# Altium PCB Power_Path_Controller.PcbDoc
Units mm, origin at the board's own origin, x right, y up, seen from the top; angles counter-clockwise.
Board outline 152.4 x 101.6 mm, 2 copper layers (Top Layer, Bottom Layer); 14 components, 6 nets, 32 pads, 0 vias.
Unrouted connection lines stored in the file: 15.
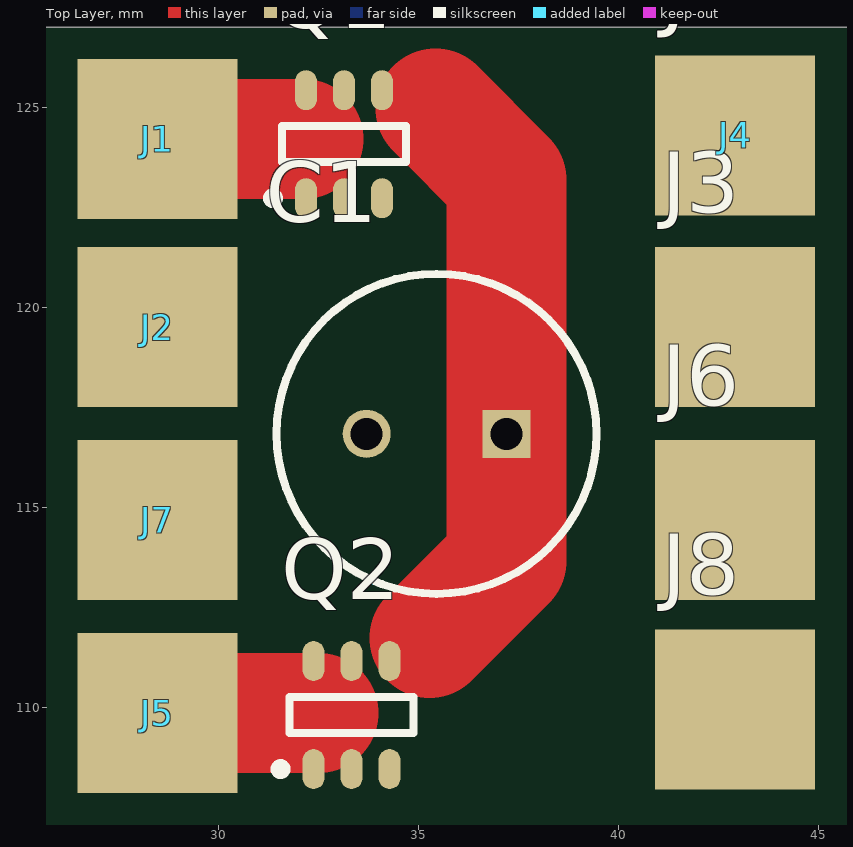
[diagram p0: Top Layer view]
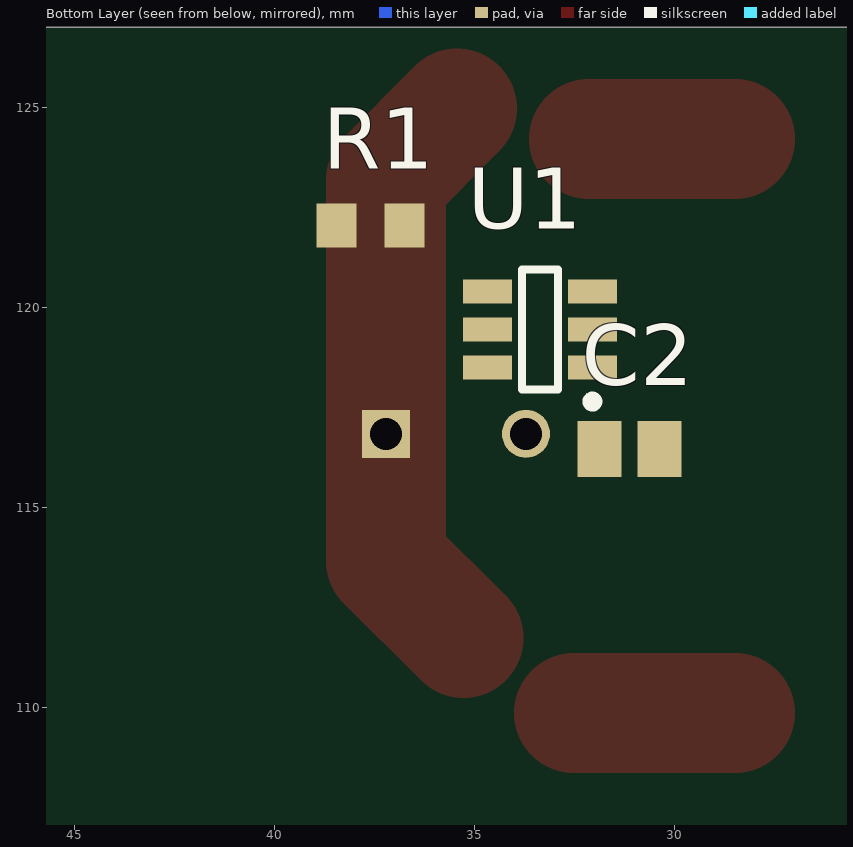
[diagram p1: Bottom Layer view, seen from below]

## Layer stack, top to bottom
Top Solder: solder mask 0.0102, Solder Resist, Dk 3.5
Top Layer: signal copper 0.0356
Dielectric 1: dielectric 0.32, FR-4, Dk 4.8
Bottom Layer: signal copper 0.0356
Bottom Solder: solder mask 0.0102, Solder Resist, Dk 3.5

## Board outline
25.4,25.4 177.8,25.4 177.8,127 25.4,127

## Design rules (kind name [scope] priority, off if disabled: settings)
Clearance [All] p1: gap=0.2 ignorepadtopadclearanceinfootprint=FALSE except(0: Arc-Hole Track-Hole SMDPad-Hole THPad-Hole Via-Hole Fill-Hole Poly-Hole Region-Hole Text-Hole)
HoleSize [All] p1: absolutevalues=TRUE maxlimit=3 minlimit=0.2 maxpercent=80.000 minpercent=20.000
HoleToHoleClearance [All] p1: gap=0.15 allowstackedmicrovias=TRUE
MinimumAnnularRing [All] p1: minimumring=0.2
PlaneClearance [All] p1: clearance=0.5
PlaneConnect [All] p1: planeconnectstyle=Relief reliefexpansion=0.3 reliefentries=4 reliefconductorwidth=0.4 reliefairgap=0.2
PolygonConnect PolygonConnect_VIA [IsVia vs InPolygon] p1: connectstyle=Direct reliefconductorwidth=0.254 reliefentries=4 polygonreliefangle="90 Angle" airgapwidth=0.254
PolygonConnect [All] p2: connectstyle=Relief reliefconductorwidth=0.3 reliefentries=4 polygonreliefangle="90 Angle" airgapwidth=0.2
RoutingCorners [All] p1: cornerstyle=45-Degree minsetback=0.2 maxsetback=2.5
RoutingVias [All] p1: holewidth=0.3 width=0.7 viastyle="Through Hole" minholewidth=0.2 minwidth=0.6 maxholewidth=3 maxwidth=4
SilkToSilkClearance [All] p1: silktosilkclearance=0.2
SilkToSolderMaskClearance [IsPad] p1: minsilkscreentomaskgap=0.2 clearancetoexposedcopper=TRUE
SolderMaskExpansion SolderMaskExpansion_VIA [IsVia] p1: expansion=-1
SolderMaskExpansion [All] p2: expansion=0.1
Width [All] p1: maxlimit=5 minlimit=0.2 preferedwidth=0.3
23 further rules are at their usual default settings.

## Components (designator, comment, footprint, x,y, rotation, side; value= is the part's Value field where it differs from the comment)
C1 "470uF" CAPPRD350W60D800H1700 37.211,116.84 r180 top
C2 "10uF*V" C0805 31.127,116.459 r0 bottom
J1 "POW_AD_18V" Wire_Pad 28.575,124.206 r90 top
J2 "POW_AD_GND" Wire_Pad 28.575,119.507 r90 top
J3 "PC_HOT" Wire_Pad 42.926,119.413 r0 top
J4 "ELEC_HOT" Wire_Pad 42.926,124.206 r0 top
J5 "BAT_16V8" Wire_Pad 28.481,109.761 r0 top
J6 "PC_GND" Wire_Pad 42.926,114.587 r0 top
J7 "BAT_GND" Wire_Pad 28.481,114.587 r0 top
J8 "ELEC_GND" Wire_Pad 42.926,109.855 r0 top
Q1 "*" TSOP95P280X110-6N 33.147,124.079 r90 top
Q2 "*" TSOP95P280X110-6N 33.335,109.808 r90 top
R1 "470k" R0603 37.592,122.047 r180 bottom
U1 "LTC4412" SOT-236 33.361,119.446 r0 bottom

## Footprints (in the part's own frame and the unit in brackets; to place one, negate y for a bottom-side part, rotate by r counter-clockwise, add the part's x,y. Pads: shape width x height; smd on the part's side, far side on the other; paste and mask are expansions set on the pad)
C0805 [mm] "Chip Capacitor, Body 2.0x1.3mm, IPC High Density"
  rect 1.1x1.4 smd: 1(-0.75,0) 2(0.75,0)
  body extent -1.1,-0.72 1.1,0.72, height 1.4
CAPPRD350W60D800H1700 [mm]
  rect 1.2x1.2 hole 0.8: 1(0,0)
  round 1.2 hole 0.8: 2(3.5,0)
  silkscreen extent -2.25,-4 5.75,4, body extent -2.5,-4.25 6,4.25, height 17
R0603 [mm] "0603 resistor"
  rect 1x1.1 smd: 1(-0.85,0) 2(0.85,0)
  body extent -0.8,-0.4 0.8,0.4, height 0.45
SOT-236 [mm] "SOT23, 6-Leads, Body 2,90x2,75mm, Pitch 0,95mm"
  rect 1.22x0.6 smd: 1(-1.31,0.95) 2(-1.31,0) 3(-1.31,-0.95) 4(1.31,-0.95) 5(1.31,0) 6(1.31,0.95)
  silkscreen extent -1.43,-1.5 0.45,1.92, body extent -0.85,-1.5 0.85,1.5, height 1.1
TSOP95P280X110-6N [mm] "TSOP, 6-Leads, Body 3.03x1.63mm, Pitch 0.95mm, IPC Medium Density"
  oval 1x0.55 smd: 1(1.35,-0.95) 2(-1.35,-0.95) 3(-1.35,0) 3(-1.35,0.95) 3(1.35,0) 3(1.35,0.95)
  silkscreen extent -1.47,-1.55 0.45,1.9, body extent -0.85,-1.55 0.85,1.55, height 1.1
Wire_Pad [mm] "Pad for soldering wires"
  rect 4x4 smd: 1(0,0.094)

## Part data
C1: library part EEUFC1E101S, "Capacitor Polarised"
C2: library part Capacitor, "Ceramic capacitor", Capacitance=10uF, Voltage Rating=*V, ComponentLinknDescription=Datasheet, Note=C0805, Type=MLCC
J1 J2 J3 J4 J5 J6 J7 J8: library part Connection_pad
Q1 Q2: library part "P-Channel MOSFET", "P-Channel MOSFET"
R1: library part Resistor, "Resistor", Power rating=*mW, Temp coefficient=*ppm, Voltage Rating=*V, ComponentLinknDescription=Datasheet, Note=R0603, Precision=*%, Resistance=470k
U1: Manufacturer="Linear Technology", ComponentLinknDescription=Datasheet, Drawn by="Erik Ilbis", Part number=LTC4412, Space heritage=false, Verified=false

## Nets (pads, with @x,y where several pads share a name; then routed paths per layer and width w, separated by ;. In a path a pad name is that pad's centre, name@x,y a point inside that pad or via, vN(x,y) a via of type N, cw(c..) or ccw(c..) an arc to the next point about the centre after c; other vN are vias at no path point)
GND: C1.2 C2.1 J2.1 J6.1 J7.1 J8.1 U1.2
NetC1_1: C1.1 J3.1 J4.1 Q1.1 Q2.1 R1.2 U1.6 | length 14.8
  Top Layer w3: 35.279,111.733 37.211,113.665 C1.1 37.211,123.19 35.433,124.968
NetC2_2: C2.2 J5.1 Q2.3 U1.1 | length 4
  Top Layer w3: J5.1 32.512,109.855
NetJ1_1: J1.1 Q1.3 | length 3.7
  Top Layer w3: J1.1 32.131,124.206
NetQ1_2: Q1.2 R1.1 U1.4
NetQ2_2: Q2.2 U1.5
pads on no net: U1.3